# EAGLE board dimmer for poor (EAGLE 7.5.0)
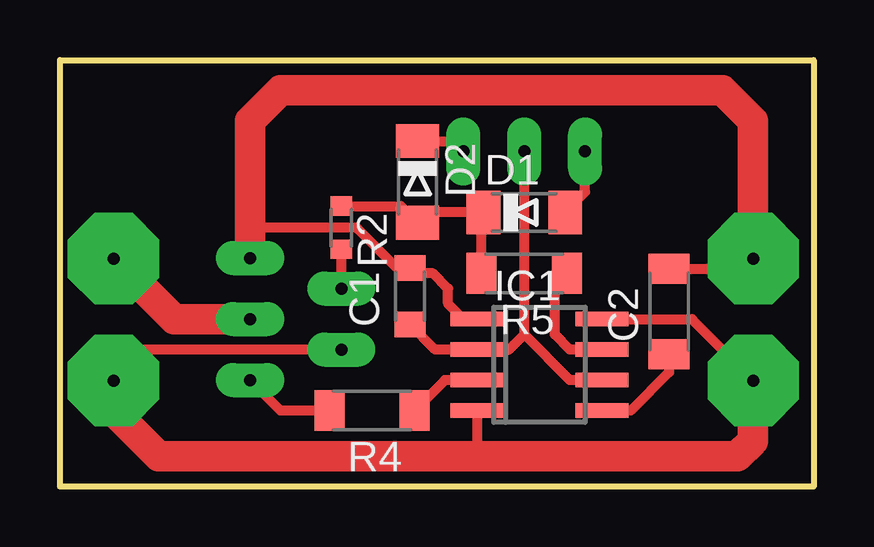
[diagram p0: board, top side]
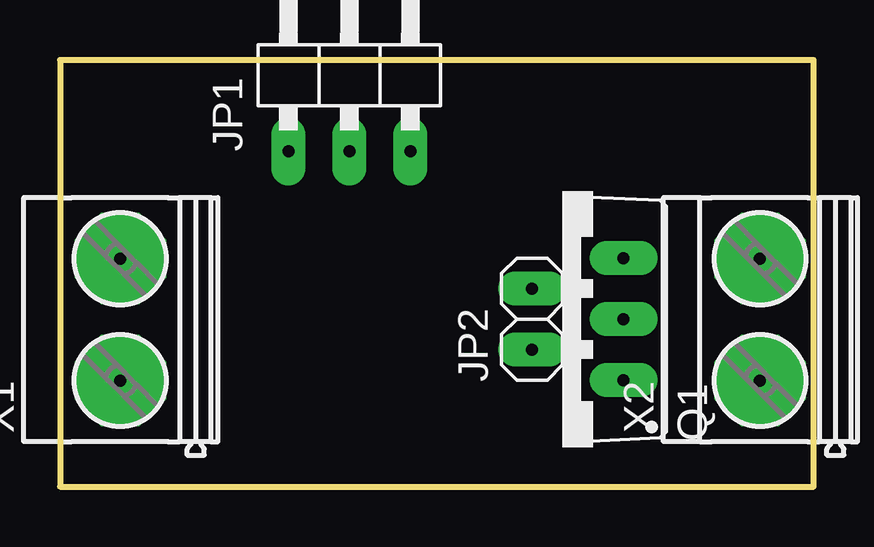
[diagram p1: board, bottom side, seen from below]

Size 31.42 x 17.77 mm. Coordinates in mm from the lower left corner, seen from the top.
Outline: 31.42,0 0,0 0,17.77 31.42,17.77 31.42,0
Copper layers (1*16): Top 0.035mm / dielectric 1.5mm / Bottom 0.035mm
Design rules "default": minimum track width 10mil, minimum drill 24mil, track to track 8mil, track to pad 8mil, pad to pad 8mil, via to via 8mil, smd to smd 8mil, copper to edge 40mil, drill to drill 8mil, minimum pad ring 10mil, minimum via ring 8mil, stop-mask expansion 4mil, vias tented up to drill 0mil, thermal gap 10mil

## Footprints (pad centres in the part's own frame; a part is rotated, then mirrored left to right if it is on the bottom)
C0805 = smd 1.05 x 1.3: 1 -1.175,0; 2 1.175,0
C1206 = smd 1.25 x 1.7: 1 -1.775,0; 2 1.775,0
MINIMELF = smd 1.4 x 1.8: A 1.7,0; C -1.7,0
SO08 = smd 0.6 x 2.2: 1 -1.905,-2.6; 2 -0.635,-2.6; 3 0.635,-2.6; 4 1.905,-2.6; 5 1.905,2.6; 6 0.635,2.6; 7 -0.635,2.6; 8 -1.905,2.6
1X03/90 = drill 0.5 pad 1.422 long: 1 -2.54,-3.81; 2 0,-3.81; 3 2.54,-3.81
1X02 = drill 0.5 pad 1.422 long: 1 -1.27,0; 2 1.27,0
TO220BV = drill 0.5 pad 1.422 long: D 0,-2.54; G -2.54,-2.54; S 2.54,-2.54
R0603 = smd 0.8 x 0.9: 1 -0.9,0; 2 0.9,0
R1206 = smd 1.25 x 1.7: 1 -1.775,0; 2 1.775,0
MKDSN1,5/2-5,08 = drill 0.5 pad 3.81 octagon: 1 -2.561,0.025; 2 2.519,0.025

## Placement (x,y rotation side)
C1  560p  [C0805]  14.59,7.94 90 top
C2  1000p  [C1206]  25.39,7.3 90 top
D1  [MINIMELF]  19.36,11.43 0 top
D2  [MINIMELF]  14.91,12.7 270 top
IC1  LM555D  [SO08]  19.99,5.08 270 top
JP1  [1X03/90]  19.36,17.78 0 bottom
JP2  [1X02]  11.73,6.98 90 bottom
Q1  STP11NK50Z  [TO220BV]  10.46,6.98 90 bottom
R2  1K  [R0603]  11.73,10.8 270 top
R4  100R  [R1206]  13.01,3.18 180 top
R5  0  [R1206]  19.36,8.89 180 top
X1  MKDSN1,5/2-5,08  [MKDSN1,5/2-5,08]  28.88,6.98 90 bottom
X2  MKDSN1,5/2-5,08  [MKDSN1,5/2-5,08]  2.21,6.98 90 bottom

## Library data of the parts
C1 C2 R2 R4 R5 = rcl
D1 D2 = diode
IC1 = linear
JP1 JP2 = pinhead
Q1 = transistor-power
X1 X2 = con-phoenix-508

## Nets
GND: C1.2 C2.2 IC1.1 Q1.S X1.2
N$1: C1.1 IC1.2 IC1.6 JP1.2
N$2: IC1.4 IC1.8 JP2.1 X1.1 X2.1
N$3: IC1.3 R4.1
N$4: Q1.G R4.2
N$5: Q1.D X2.2
N$6: D1.C D2.A R2.1 R5.2
N$7: IC1.7 R5.1
N$8: C2.1 IC1.5
N$10: D1.A JP1.1
N$11: D2.C JP1.3
N$12: JP2.2 R2.2

## Tracks (layer width: path | path; a pad name or v marks a point on that pad's centre or on a via)
GND
  Top 0.406: 28.88,9.53 X1.2 28.48,9.08 C2.2 | 7.93,10.8 12.37,10.8 14.05,9.11 C1.2 14.81,8.89 15.55,8.89 16.18,8.26 16.18,7.62 16.82,6.98 IC1.1
  Top 1.27: Q1.S 7.93,10.8 7.93,15.24 9.2,16.51 27.61,16.51 28.88,15.24 28.88,9.53
N$1
  Top 0.406: C1.1 15.64,5.72 IC1.2 18.72,5.72 19.36,6.35 | 19.36,6.35 JP1.2 | IC1.6 21.26,4.45 19.36,6.35
N$2
  Top 0.406: 28.88,4.4 X1.1 26.34,6.98 IC1.8 | JP2.1 3.53,5.72 X2.1 | IC1.4 17.39,1.33 17.45,1.27
  Top 1.27: X2.1 2.24,3.15 4.12,1.27 17.45,1.27 19.36,1.27 28.25,1.27 28.88,1.91 28.88,4.4
N$3
  Top 0.406: IC1.3 16.05,4.45 R4.1
N$4
  Top 0.406: R4.2 9.2,3.18 Q1.G
N$5
  Top 1.27: Q1.D 4.75,6.98 X2.2
N$6
  Top 0.406: R2.1 14.21,11.7 D2.A 15.34,11.43 D1.C 17.58,11.36 R5.2
N$7
  Top 0.406: IC1.7 21.26,5.72 20.62,6.35 20.62,8.26 21.13,8.76 R5.1
N$8
  Top 0.406: C2.1 25.39,4.76 23.8,3.18 IC1.5
N$10
  Top 0.406: D1.A 21.89,12.27 JP1.1
N$11
  Top 0.406: D2.C 16.39,14.4 JP1.3
N$12
  Top 0.406: JP2.2 11.73,9.26 R2.2